# Altium PCB PCB1.1.PcbDoc
Units mil, origin at the board's own origin, x right, y up, seen from the top; angles counter-clockwise.
Board outline 7823 x 1721 mil, 2 copper layers (Top Layer, Bottom Layer); 47 components, 80 nets, 307 pads, 119 vias.
Unrouted connection lines stored in the file: 1.
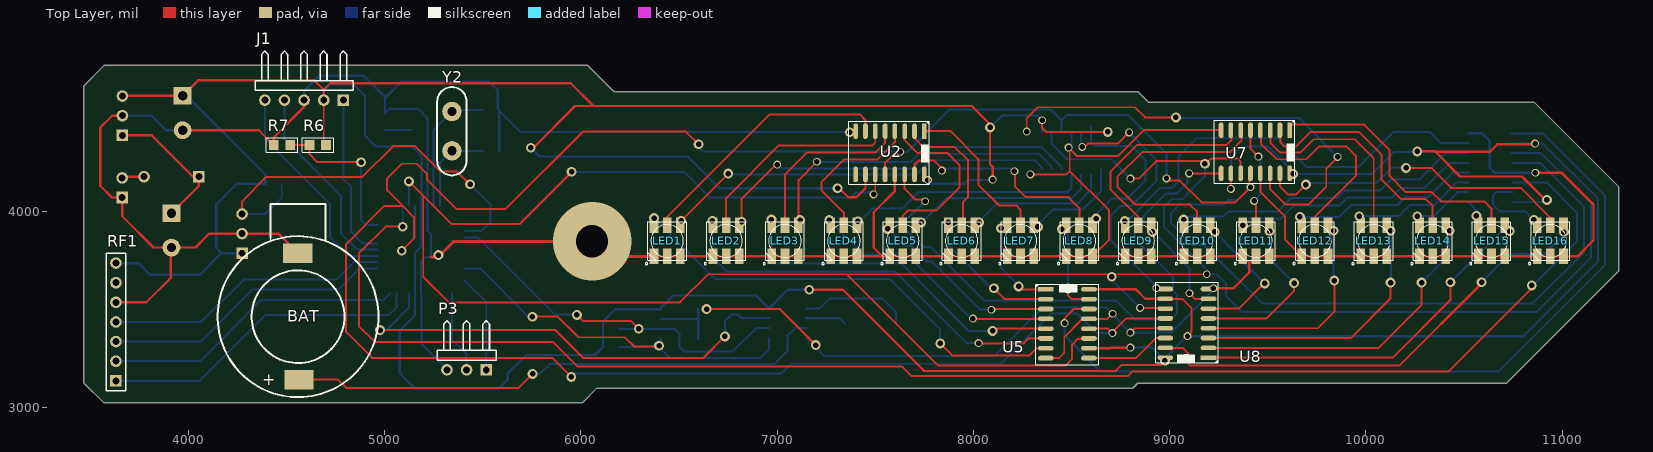
[diagram p0: Top Layer view]
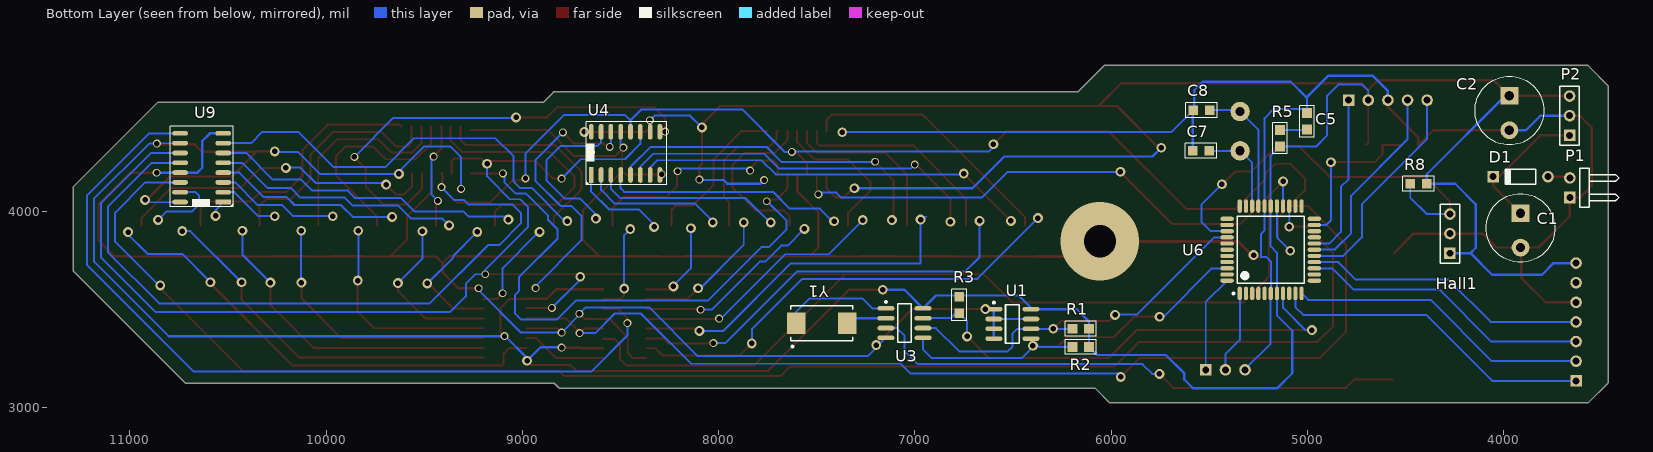
[diagram p1: Bottom Layer view, seen from below]

## Layer stack, top to bottom
Top Layer: signal copper 1.4
Dielectric: dielectric 12.6, FR-4, Dk 4.8
Bottom Layer: signal copper 1.4

## Board outline
3571,4743 3466,4638 3466,4628 3466,3128 3470,3124 3568,3026 3570,3026 6007,3026 6008,3025 6083,3100 6085,3100 8813,3100 8815,3102 8838,3125 8839,3125 10716,3125 11289,3698 11289,3701 11289,4125 10857,4557 10854,4557 8892,4557 8890,4559 8843,4606 8843,4611 6168,4611 6167,4612 6033,4746 6031,4746 3573,4746 3572,4745

## Design rules (kind name [scope] priority, off if disabled: settings)
Clearance [All] p1: gap=10
PolygonConnect [All] p1: connectstyle=Relief reliefconductorwidth=10 reliefentries=4 polygonreliefangle="90 Angle" airgapwidth=10
RoutingVias [All] p1: holewidth=28 width=50 viastyle="Through Hole" minholewidth=28 minwidth=50 maxholewidth=28 maxwidth=50
SilkscreenOverComponentPads [All] p1: minsilkscreentomaskgap=10
SolderMaskExpansion [All] p1: expansion=4
Width [All] p1: maxlimit=10 minlimit=10 preferedwidth=10
27 further rules are at their usual default settings.

## Classes and differential pairs
component class SCH1.1: BAT C1 C2 C5 C7 C8 D1 Hall1 J1 LED1 LED2 LED3 LED4 LED5 LED6 LED7 LED8 LED9 LED10 LED11 LED12 LED13 LED14 LED15 LED16 P1 P2 P3 R1 R2 R3 R5 R6 R7 R8 RF1 U2 U3 U5 U6 U7 U8 U9 Y2

## Components (designator, comment, footprint, x,y, rotation, side; value= is the part's Value field where it differs from the comment)
BAT "Battery" BATTERY 4559,3864 r270 top
C1 "Cap Pol3" "CAP POL 2" 3914,3991 r270 bottom
C2 "Cap Pol3" "CAP POL 2" 3971,4589 r270 bottom
C5 "Cap Semi" SM/C_0805 5002,4501 r270 bottom
C7 "Cap Semi" SM/C_0805 5584,4309 r180 bottom
C8 "Cap Semi" SM/C_0805 5582,4516 r180 bottom
D1 "Diode 1N4148" DO-35 3914,4177 r0 bottom
Hall1 "Header 3" HDR1X3 4274,3787 r90 bottom
J1 "Programming" HDR1X5H 4790,4567 r180 top
LED1 "or 5050 LEDs, the order of the LEDs may vary from one manufacturer to another!" RGBLED5050 6440,3850 r270 top
LED2 "or 5050 LEDs, the order of the LEDs may vary from one manufacturer to another!" RGBLED5050 6740,3850 r270 top
LED3 "or 5050 LEDs, the order of the LEDs may vary from one manufacturer to another!" RGBLED5050 7040,3850 r270 top
LED4 "or 5050 LEDs, the order of the LEDs may vary from one manufacturer to another!" RGBLED5050 7340,3850 r270 top
LED5 "or 5050 LEDs, the order of the LEDs may vary from one manufacturer to another!" RGBLED5050 7640,3850 r270 top
LED6 "or 5050 LEDs, the order of the LEDs may vary from one manufacturer to another!" RGBLED5050 7940,3850 r270 top
LED7 "or 5050 LEDs, the order of the LEDs may vary from one manufacturer to another!" RGBLED5050 8240,3850 r270 top
LED8 "or 5050 LEDs, the order of the LEDs may vary from one manufacturer to another!" RGBLED5050 8540,3850 r270 top
LED9 "or 5050 LEDs, the order of the LEDs may vary from one manufacturer to another!" RGBLED5050 8840,3850 r270 top
LED10 "or 5050 LEDs, the order of the LEDs may vary from one manufacturer to another!" RGBLED5050 9140,3850 r270 top
LED11 "or 5050 LEDs, the order of the LEDs may vary from one manufacturer to another!" RGBLED5050 9440,3850 r270 top
LED12 "or 5050 LEDs, the order of the LEDs may vary from one manufacturer to another!" RGBLED5050 9740,3850 r270 top
LED13 "or 5050 LEDs, the order of the LEDs may vary from one manufacturer to another!" RGBLED5050 10040,3850 r270 top
LED14 "or 5050 LEDs, the order of the LEDs may vary from one manufacturer to another!" RGBLED5050 10340,3850 r270 top
LED15 "or 5050 LEDs, the order of the LEDs may vary from one manufacturer to another!" RGBLED5050 10640,3850 r270 top
LED16 "or 5050 LEDs, the order of the LEDs may vary from one manufacturer to another!" RGBLED5050 10940,3850 r270 top
P1 "DC 12V" HDR1X2H 3663,4071 r90 bottom
P2 "7805" HDR1X3 3664,4388 r90 bottom
P3 "Header 3H" HDR1X3H 5518,3193 r180 top
R1 "Res Semi" SM/C_0805 6197,3402 r180 bottom
R2 "Res Semi" SM/C_0805 6197,3310 r180 bottom
R3 "Res Semi" SM/C_0805 6774,3565 r270 bottom
R5 "Res Semi" SM/C_0805 5140,4415 r270 bottom
R6 "Res Semi" SM/C_0805 4618,4338 r0 top
R7 "Res Semi" SM/C_0805 4435,4338 r0 top
R8 "Res Semi" SM/C_0805 4476,4141 r180 bottom
RF1 "RF Module" HDR1X7 3631,3137 r90 top
U1 "AT24C01BN-SP25-T" 8S1_N 6503,3427 r180 bottom
U2 "74595" SO16 7750,4409 r270 top
U3 "DS1307Z" SOIC8N_N 7053,3431 r180 bottom
U4 "74595" SO16 8649,4186 r90 bottom
U5 "74595" SO16 8369,3603 r0 top
U6 "PIC16F887-E/PT" TQFP-PT44_N 5187,3805 r90 bottom
U7 "74595" SO16 9612,4414 r270 top
U8 "74595" SO16 9198,3255 r180 top
U9 "74595" SO16 10524,4048 r0 bottom
Y1 "32,768KHz" CFPX-93 7475,3430 r180 bottom
Y2 "20MHz" CRYSTAL 5343,4309 r90 top

## Footprints (in the part's own frame and the unit in brackets; to place one, negate y for a bottom-side part, rotate by r counter-clockwise, add the part's x,y. Pads: shape width x height; smd on the part's side, far side on the other; paste and mask are expansions set on the pad)
8S1_N [mm] "SOIC, 8-Leads, Body 4.9x3.9mm, Pitch 1.27mm, IPC Medium Density"
  oval 2.2x0.6 smd: 1(-2.4,1.905) 2(-2.4,0.635) 3(-2.4,-0.635) 4(-2.4,-1.905) 5(2.4,-1.905) 6(2.4,-0.635) 7(2.4,0.635) 8(2.4,1.905)
  silkscreen extent -2.53,-2.5 0.9,2.88, body extent -2,-2.5 2,2.5, height 1.75
BATTERY [mil]
  rect 100x150 smd: 1(76,-1) 2(721,5)
  silkscreen extent -175,-410 810,410
"CAP POL 2" [mil]
  rect 90.53x90.53 hole 47.23: 1(0,0)
  round 90.53 hole 47.23: 2(175,0)
  silkscreen extent -100,-175 250,175
CFPX-93 [mm] "Surface Mount Quartz Crystal; Body 8.2 x 4.7 mm (LxW max)"
  rect 2.4x2.8 smd: 1(-3.3,0) 2(3.3,0)
  silkscreen extent -4,-3.14 4,2.25
CRYSTAL [mil]
  round 98.43 hole 47.23: 1(0,0) 2(200,0)
  silkscreen extent -125,-75 325,75
DO-35 [mm] "Diode, Axial; Body 3.8 x 1.9 mm (LxDia. max), Lead Dia. 0.53 mm (max)"
  round 1.5 hole 0.9: 1(-3.55,0)
  rect 1.5x1.5 hole 0.9: 2(3.55,0)
  silkscreen extent -1.95,-0.95 2.05,0.95
HDR1X2H [mm] "Connector; Header; 2 Position; Right Angle"
  rect 1.5x1.5 hole 0.9: 1(0,0)
  round 1.5 hole 0.9: 2(2.54,0)
  silkscreen extent -1.27,-6.35 3.81,-1.27
HDR1X3 [mm] "Connector; Header; 3 Position"
  rect 1.5x1.5 hole 0.9: 1(0,0)
  round 1.5 hole 0.9: 2(2.54,0) 3(5.08,0)
  silkscreen extent -1.27,-1.27 6.35,1.27
HDR1X3H [mm] "Connector; Header; 3 Position; Right Angle"
  rect 1.5x1.5 hole 0.9: 1(0,0)
  round 1.5 hole 0.9: 2(2.54,0) 3(5.08,0)
  silkscreen extent -1.27,-6.35 6.35,-1.27
HDR1X5H [mm] "Connector; Header; 5 Position; Right Angle"
  rect 1.5x1.5 hole 0.9: 1(0,0)
  round 1.5 hole 0.9: 2(2.54,0) 3(5.08,0) 4(7.62,0) 5(10.16,0)
  silkscreen extent -1.27,-6.35 11.43,-1.27
HDR1X7 [mm] "Connector; Header; 7 Position"
  rect 1.5x1.5 hole 0.9: 1(0,0)
  round 1.5 hole 0.9: 2(2.54,0) 3(5.08,0) 4(7.62,0) 5(10.16,0) 6(12.7,0) 7(15.24,0)
  silkscreen extent -1.27,-1.27 16.51,1.27
RGBLED5050 [mil]
  rect 79x44 smd: 1(-78.74,67) 2(-78.74,0) 3(-78.74,-66.93) 4(79,-66.93) 5(79,0) 6(79,67)
  silkscreen extent -98,-112 122,99
SM/C_0805 [mil]
  rect 50x50 smd: 1(0,0) 2(84,0)
  silkscreen extent -38,-38 122,38
SO16 [mil]
  rect 80x24 smd: 1(0,0)
  oval 80x24 smd: 2(0,-50) 3(0,-100) 4(0,-150) 5(0,-200) 6(0,-250) 7(0,-300) 8(0,-350) 9(220,-350) 10(220,-300) 11(220,-250) 12(220,-200) 13(220,-150) 14(220,-100) 15(220,-50) 16(220,0)
  silkscreen extent -50,-385 270,25, body extent -20,-385 240,25, height 61
SOIC8N_N [mm] "SOIC, 8-Leads, Body 4.9x3.9mm, Pitch 1.27mm, IPC Medium Density"
  oval 2.2x0.6 smd: 1(-2.4,1.905) 2(-2.4,0.635) 3(-2.4,-0.635) 4(-2.4,-1.905) 5(2.4,-1.905) 6(2.4,-0.635) 7(2.4,0.635) 8(2.4,1.905)
  silkscreen extent -2.53,-2.5 0.9,2.88, body extent -2,-2.5 2,2.5, height 1.75
TQFP-PT44_N [mm] "Thin QFP, 44-Leads, Body 10x10mm, Pitch 0.8mm, IPC Medium Density"
  oval 1.75x0.55 smd: 1(-5.65,4) 2(-5.65,3.2) 3(-5.65,2.4) 4(-5.65,1.6) 5(-5.65,0.8) 6(-5.65,0) 7(-5.65,-0.8) 8(-5.65,-1.6) 9(-5.65,-2.4) 10(-5.65,-3.2) 11(-5.65,-4) 23(5.65,-4) 24(5.65,-3.2) 25(5.65,-2.4) 26(5.65,-1.6) 27(5.65,-0.8) 28(5.65,0) 29(5.65,0.8) 30(5.65,1.6) 31(5.65,2.4) 32(5.65,3.2) 33(5.65,4)
  oval 0.55x1.75 smd: 12(-4,-5.65) 13(-3.2,-5.65) 14(-2.4,-5.65) 15(-1.6,-5.65) 16(-0.8,-5.65) 17(0,-5.65) 18(0.8,-5.65) 19(1.6,-5.65) 20(2.4,-5.65) 21(3.2,-5.65) 22(4,-5.65) 34(4,5.65) 35(3.2,5.65) 36(2.4,5.65) 37(1.6,5.65) 38(0.8,5.65) 39(0,5.65) 40(-0.8,5.65) 41(-1.6,5.65) 42(-2.4,5.65) 43(-3.2,5.65) 44(-4,5.65)
  silkscreen extent -5.77,-4.35 4.35,4.95, body extent -5,-5 5,5, height 1.2

## Part data
C1 C2: "Polarized Capacitor (Surface Mount)"
C5 C7 C8: "Capacitor (Semiconductor SIM Model)"
D1: "High Conductance Fast Diode"
Hall1: "Header, 3-Pin"
J1: library part "Header 5H", "Header, 5-Pin, Right Angle"
LED1 LED2 LED3 LED4 LED5 LED6 LED7 LED8 LED9 LED10 LED11 LED12 LED13 LED14 LED15 LED16: library part RGBLED5050
P1: library part "Header 2H", "Header, 2-Pin, Right Angle"
P2: library part "Header 3", "Header, 3-Pin"
P3: "Header, 3-Pin, Right Angle"
R1 R2 R3 R5 R6 R7 R8: "Semiconductor Resistor"
RF1: library part "Header 7", "Header, 7-Pin"
U1: "1Kbit (128 x 8), 2-wire Bus Automotive Serial EEPROM with Write Protect, 2.5V, 8-Pin SOIC, Tape & Reel"
U2 U4 U5 U7 U8 U9: "8-BIT SFT REG WIRTH OUTPUT LCH"
U3: "64 X 8 Serial Real-Time Clock"
U6: "Flash-Based, 8-Bit CMOS Microcontroller with nanoWatt Technology, 8K (x14-Bit words) Program Memory, 624 Bytes Data Memory, 35 I/O pins, 44-Pin TQFP, Standard VDD Range, Extended Temperature"
Y1: library part CFPX-93, "Surface Mount Quartz Crystal"
Y2: library part XTAL

## Via types
v1: diameter 50, hole 28, Top Layer to Bottom Layer, 79 vias
v2: diameter 40, hole 28, Top Layer to Bottom Layer, 39 vias
v3: diameter 400, hole 165, Top Layer to Bottom Layer, 1 vias

## Nets (pads, with @x,y where several pads share a name; then routed paths per layer and width w, separated by ;. In a path a pad name is that pad's centre, name@x,y a point inside that pad or via, vN(x,y) a via of type N, cw(c..) or ccw(c..) an arc to the next point about the centre after c; other vN are vias at no path point)
CLOCK: U2.12 U4.12 U5.12 U6.27 U7.12 U8.12 U9.12 | length 15175.2
  Top Layer w10: v1(5087,3800) 5149,3862 5149,3971 5092,4028 ; v1(5951,3157) 5854,3254 4937,3254 4804,3387 4804,3833 4999,4028 5092,4028 ; v1(6600,4342) 6535,4407 6011,4407 5617,4013 5366,4013 5217,4162 5217,4190 5164,4243 5087,4243 5013,4169 5013,4107 5092,4028 ; U2.12 7550,4249 7604,4303 v2(7627,4303) ; U5.12 8685,3403 v2@8705.5,3382.5 ; v2(8708,3380) v2@8705.5,3382.5 ; U8.12 8778,3455 v2@8705.5,3382.5 ; v2(8984,4168) 8995,4157 9052,4157 9163,4046 9334,4046 v2(9412,4124) ; v2@9408,4124 9408,4190 U7.12
  Bottom Layer w10: v1(5087,3800) 5155.5,3868.5 U6.27 ; v1@5951,3167 5958,3174 7022,3174 7072,3224 8140,3224 8396,3480 8529,3480 8629,3380 v2(8708,3380) ; v1@6597,4331 6623,4305 7619,4305 7619,4295 v2(7627,4303) 7662,4303 7879,4520 8393,4520 8449,4464 ; U4.12 8449,4464 ; v2@8983,4159 8983,4296 8788,4491 8476,4491 8449,4464 ; v2(9412,4124) 9346,4058 9297,4058 9274,4035 9050,4035 9008,3993 9008,3939 9118,3829 9175,3829 9472,3532 10851,3532 11112,3793 11112,4024 10888,4248 U9.12@10748,4248
DO: U6.25 U9.14 | length 7910.4
  Top Layer w10: v1(5092.51,3922.51) 5005.51,3922.51 4869,3786 4869,3416 4949,3336 5858,3336 5985,3209 7637,3209 7685,3161 8787,3161 8810,3184 10420,3184 10845,3609 v1(10845,3623)
  Bottom Layer w10: v1@5083,3913 v1(5092.51,3922.51) U6.25 ; U9.14@10749,4148 10921,4148 11075,3994 11075,3845 10853,3623 v1(10845,3623)
ENABLE: U2.11 U4.11 U5.11 U6.26 U7.11 U8.11 U9.11 | length 14227.2
  Top Layer w10: v1(5124,4153) 5197,4080 ; v1@5954,4201 5690,3937 5340,3937 5197,4080 ; 7357,3680 v2(9189,3680) ; v2@7500,4087 U2.11 ; U5.11 8587,3351 8532,3351 8503,3322 8503,3250 8468,3215 7821,3215 7356,3680 6648,3680 6505,3537 5326,3537 5197,3666 5197,4080 ; v2(8800.5,4167.5) 8842.5,4167.5 8931,4256 9167,4256 v1@9179.5,4243.5 ; v2(8849,3509) 8974,3509 U8.11 ; v1(9180,4243) v1@9179.5,4243.5 ; U7.11 9362,4254 9346,4270 9211,4270 9184.5,4243.5 v1@9179.5,4243.5
  Bottom Layer w10: U6.26 v1@5124.01,4163 ; v1(5953,4202) 6528,4202 6659,4071 7375,4071 7400,4096 v2@7492,4096 ; U4.11 8399,4344 8477,4266 8702,4266 v2(8800.5,4167.5) ; v1(8705,3667) 8705,3653 v2(8849,3509) ; v1@9179.5,4243 9179.5,4178.5 9063.12,4062.12 9011.12,4062.12 8971,4022 8971,3921 9189,3703 v2(9189,3680) 9240,3680 9288.25,3631.75 9288.25,3567.75 9369,3487 10867,3487 11147,3767 11147,4041 10890,4298 U9.11@10741,4298
  other v2: 7492,4087
GND: BAT.1 C1.2 C2.2 C5.1 C7.1 C8.1 Hall1.2 J1.3 LED1.4 LED1.5 LED1.6 LED2.4 LED2.5 LED2.6 LED3.4 LED3.5 LED3.6 LED4.4 LED4.5 LED4.6 LED5.4 LED5.5 LED5.6 LED6.4 LED6.5 LED6.6 LED7.4 LED7.5 LED7.6 LED8.4 LED8.5 LED8.6 LED9.4 LED9.5 LED9.6 LED10.4 LED10.5 LED10.6 LED11.4 LED11.5 LED11.6 LED12.4 LED12.5 LED12.6 LED13.4 LED13.5 LED13.6 LED14.4 LED14.5 LED14.6 LED15.4 LED15.5 LED15.6 LED16.4 LED16.5 LED16.6 P1.1 P2.2 P3.3 R7.1 RF1.5 U1.1 U1.2 U1.3 U1.4 U1.7 U2.8 U2.13 U3.4 U4.8 U4.13 U5.8 U5.13 U6.6 U6.29 U7.8 U7.13 U8.8 U8.13 U9.8 U9.13 | length 22510.8
  Top Layer w10: 4590,4532 J1.3 ; v3(6057,3849) v3@6135,3771 ; LED1.4 LED1.5 LED1.6 ; LED2.4 LED2.5 LED2.6 ; LED3.4 LED3.5 LED3.6 ; LED4.4 LED4.5 LED4.6 ; 7536,3771 LED5.4 LED5.5 LED5.6 ; LED6.4 LED6.5 LED6.6 ; LED7.4 LED7.5 LED7.6 ; v2(8291,4189) 8474,4189 8491,4206 ; U5.8 8435,3253 8463,3281 8463,3360 8556,3453 U5.13 8683,3453 v2(8709,3479) ; LED8.4 LED8.5 LED8.6 8692,3856 8692,4005 8491,4206 ; v2(8485,4325) 8528,4282 8735,4282 8867,4414 U7.8 ; v2@8491,4325 8491,4206 ; LED9.4 LED9.5 LED9.6 ; v2(8800,3383) 8822,3405 U8.13 ; LED10.4 LED10.5 LED10.6 ; LED11.4 9405,3739.07 9405,3736 LED11.5 LED11.6 ; U7.13 9462,4100 9588,3974 9588,3856.07 LED12.4 LED12.5 LED12.6 ; LED13.4 LED13.5 LED13.6 ; LED14.4 LED14.5 LED14.6 ; LED15.4 LED15.5 LED15.6 ; LED16.4 LED16.5 LED16.6
  Top Layer w12: RF1.5 3786,3537 3911,3662 C1.2@3911,3816 ; P2.2 3612,4488 3551,4427 3551,4131 3611,4071 P1.1 3663,3976 3823,3816 C1.2 4036,3816 4107,3887 4459,3887 BAT.1 ; C2.2 4359,4414 R7.1 4435,4377 4590,4532 ; LED1.6 LED2.4 ; v1(6641,3503) 7013,3503 v1(7197,3319) ; LED2.6 LED3.4 ; LED3.6 LED4.4 ; LED4.6 7536,3771 7492,3815 7492,3996 7600,4104 U2.13 ; LED5.6 LED6.4 ; LED6.6 LED7.4 ; LED7.6 LED8.4 ; LED8.6 LED9.4 ; LED9.6 LED10.4 ; LED10.6 LED11.4 ; U8.8@9225,3609 9326,3609 9405,3688 9405,3736 ; LED11.6 LED12.4 ; LED12.6 LED13.4 ; LED13.6 LED14.4 ; LED14.6 LED15.4 ; LED15.6 LED16.4 ; v2@10864,4198 10997,4198 11160,4035 11160,3853 11078,3771 LED16.6
  Top Layer w15: 5237,3767 5272,3767 5352,3847 v3@6038,3847 ; v3@6135,3771 LED1.4
  Bottom Layer w10: C5.1 5022,4521 5173,4521 5218.5,4475.5 U6.29 ; 5002,4578 5004.5,4580.5 ; U6.29@5218,4026 5218,3904 5237,3885 5237,3767 5208,3767 5186,3745 5186,3583.56 U6.6 5187,3327 5314,3200 5311,3200 P3.3 ; C8.1@5577,4521 C8.1 5584,4514 5692,4406 6053,4406 6055,4404 v1(7370,4404) ; U3.4 7240.49,3263 8106,3263 8354,3511 8677,3511 v2(8709,3479) 8704,3479 v2(8800,3383) 9007,3383 9223,3599 9223,3602 v2@9207,3618 ; v2(8485,4325) 8499,4339 U4.13
  Bottom Layer w12: P2.2 3813,4488 3887,4414 C2.2 ; J1.3 4590,4613 4669,4692 4893,4692 5004.5,4580.5 5085,4661 5534,4661 5577,4618 C8.1@5577,4521 ; C5.1 5002,4578 ; C7.1 C8.1@5584,4514 ; U1.7 U1.2 ; U1.4 U1.3 U1.2 ; U1.1 U1.2 ; U9.8@10523,4398 10592,4398 10631,4359 10631,4223 10656,4198 v2@10864,4198
  other v1: 5274,3778
  other v2: 9223,3609 10864,4197
MCLR: J1.1 U6.18 | length 846.8
  Bottom Layer w10: J1.1 4790,4165 4830,4125 4830,3896 4889.5,3836.5 U6.18
NetBat_2: BAT.2 U3.3 | length 2773.7
  Top Layer w10: BAT.2 4565,3144 4761,3144 4804,3101 5683,3101 v1(5754,3172)
  Bottom Layer w10: v1(5754,3172) 5791,3172 5841,3222 6986,3222 7052,3288 7052,3366 7092,3406 U3.3
NetC1_1: C1.1 D1.2 P2.1 | length 721.1
  Top Layer w10: 4024,4177 D1.2
  Top Layer w12: P2.1 3813,4388 4024,4177 ; C1.1 4053.76,4130.76 D1.2
NetC5_2: C5.2 R5.1 | length 138.8
  Bottom Layer w10: C5.2 5004,4415 R5.1
NetC7_2: C7.2 U6.31 Y2.1 | length 464
  Bottom Layer w10: U6.31 5281.49,4184.49 5281.49,4247.49 Y2.1 C7.2
NetC8_2: C8.2 U6.30 Y2.2 | length 716
  Bottom Layer w10: U6.30 5249.99,4377.99 5249.99,4415.99 Y2.2 ; Y2.2@5343,4471 Y2.2 ; C8.2 5350,4516 Y2.2
NetD1_1: D1.1 P1.2 | length 113.7
  Top Layer w10: P1.2 P1.2@3669,4177
  Top Layer w12: P1.2@3669,4177 D1.1
NetLED1_1: LED1.1 U4.7 | length 1995.6
  Top Layer w10: v1(6511,3952) 6511,3953 v1(6751,4193)
  Bottom Layer w10: v1(6511,3952) v1@6521,3952 ; v1@6758,4189 7710,4189 7782,4261 8312,4261 8349,4224 U4.7@8349,4215
NetLED1_2: LED1.2 U2.7 | length 1338.9
  Top Layer w10: LED1.2 6440,3972 6963,4495 7421,4495 7450,4466 U2.7
NetLED1_3: LED1.3 U5.7 | length 2342
  Top Layer w10: v1(7831,3328) 7892,3267 8286,3267 8322,3303 U5.7
  Bottom Layer w10: v1(6373,3966) 6682,3657 7573,3657 7831,3399 v1(7831,3328)
NetLED2_1: LED2.1 U4.6 | length 1849.6
  Top Layer w10: v1(6819,3948) 6819,4065 6993,4239 v2(7001,4239)
  Bottom Layer w10: v2(7001,4239) 7022,4218 7692,4218 7768,4294 8333,4294 8399,4228 U4.6@8399,4215
NetLED2_2: LED2.2 U2.6 | length 1075.1
  Top Layer w10: LED2.2 6740,4068 7009,4337 7487,4337 7500,4350 U2.6
NetLED2_3: LED2.3 U5.6 | length 2069.8
  Top Layer w10: v2@8037,3339 8048,3328 8257.5,3328 8282.5,3353 U5.6
  Bottom Layer w10: v1(6670,3952) 6670,3768 6743,3695 7600,3695 7966,3329 v2(8027,3329)
NetLED3_1: LED3.1 U4.5 | length 1638.1
  Top Layer w10: v1@7110,3973 7110,4160 v2(7203,4253)
  Bottom Layer w10: v2@7216,4251 7678,4251 7756,4329 8347,4329 8449,4227 U4.5@8449,4215
  other v1: 7117,3956
NetLED3_2: LED3.2 U2.5 | length 895.9
  Top Layer w10: LED3.2 7040,4188 7152,4300 7501,4300 7550,4349 U2.5
NetLED3_3: LED3.3 U5.5 | length 1812.6
  Top Layer w10: v1@8083,3391 v1(8098,3391) 8110,3403 U5.5
  Bottom Layer w10: 6942,3973 v1@6967,3973 ; v1(6971,3959) 6971,3736 7632,3736 7977,3391 8089,3391 v1@8098,3400
NetLED4_1: LED4.1 U4.4 | length 1229.9
  Bottom Layer w10: v1(7412,3950) 7429,3950 7431,3952 7431,3961 7484,4014 7637,4014 7723,4100 8481,4100 8499,4118 U4.4
NetLED4_2: LED4.2 U2.4 | length 782.8
  Top Layer w10: LED4.2 7340,3994 7225,4109 7225,4148 7342,4265 7512,4265 7600,4353 U2.4
NetLED4_3: LED4.3 U5.4 | length 1302.3
  Top Layer w10: v2@7998,3453 U5.4
  Bottom Layer w10: v1(7266,3956) 7440,3782 7660,3782 v2@7989,3453
  other v2: 7998,3454
NetLED5_1: LED5.1 U4.3 | length 965.4
  Bottom Layer w10: v1@7729,3934 7863,4068 8501,4068 8549,4116 U4.3
  other v1: 7734,3944
NetLED5_2: LED5.2 U2.3 | length 890.1
  Top Layer w10: LED5.2 7640,3978 7666,4004 7812,4004 7929,4121 7929,4237 7869,4297 7717,4297 7650,4364 U2.3
NetLED5_3: LED5.3 U5.3 | length 993.2
  Top Layer w10: v2@8092,3503 U5.3
  Bottom Layer w10: v1@7550.5,3898.5 v1@7550.5,3915.5 ; v1(7563,3911) 7648,3826 7682,3826 7763.5,3744.5 7790.5,3744.5 8035,3500 v2@8092,3500
  other v2: 8092,3499
NetLED6_1: LED6.1 U4.2 | length 722.6
  Bottom Layer w10: v1@8022,3942 8120,4040 8529,4040 8599,4110 U4.2
  other v1: 8030,3944
NetLED6_2: LED6.2 U2.2 | length 697.8
  Top Layer w10: U2.2 7706,4403 7706,4367 7745,4328 7905,4328 7973,4260 7973,4074 7947,4048 LED6.2@7947,3928.74
NetLED6_3: LED6.3 U5.2 | length 739.5
  Top Layer w10: v1@8119,3623 8119,3594 8160,3553 U5.2
  Bottom Layer w10: v1(7872,3944) 7872,3830 v1@8105,3597
  other v1: 8105,3609
NetLED7_1: LED7.1 U4.1 | length 515.8
  Bottom Layer w10: v1(8329,3921) 8329,3933 8405,4009 8556,4009 8651,4104 U4.1@8651,4215
NetLED7_2: LED7.2 U2.1 | length 812.7
  Top Layer w10: U2.1 7884,4409 8026,4267 8026,4136 8130.5,4031.5 8217.5,4031.5 8240,4009 LED7.2
NetLED7_3: LED7.3 U5.1 | length 479.3
  Top Layer w10: v1(8230,3618) 8245,3603 U5.1
  Bottom Layer w10: v1(8141,3914) 8141,3710 v1@8233,3618
NetLED8_1: LED8.1 U4.15 | length 864.2
  Bottom Layer w10: U4.15@8599,4435 8599,4352 8618,4333 8807,4333 8878,4262 8878,4158 8785,4065 8705,4065 8611,3971 8611,3956 v1@8610,3955
  other v1: 8625,3964
NetLED8_2: LED8.2 U2.15 | length 1141.6
  Top Layer w10: U2.15 7700,4241 7718,4259 7800,4259 v2@7845.5,4213.5 ; v2@8211,4205 8211,4129 8267,4073 8484,4073 8540,4017 LED8.2
  Bottom Layer w10: v2(7840,4208) 7852,4220 8199,4220 v2@8209,4210
  other v2: 8209,4205
NetLED8_3: LED8.3 U5.15 | length 465.5
  Top Layer w10: v1(8481,3607) 8481,3574 8502,3553 U5.15
  Bottom Layer w10: v1(8450,3910) 8481,3879 v1(8481,3607)
NetLED9_1: LED9.1 U8.7 | length 522.9
  Top Layer w10: v2(9101,3583) 9129,3555 U8.7
  Bottom Layer w10: v1@8931,3900 8912,3881 8931,3881 9101,3711 v2(9101,3583)
  other v1: 8912,3896
NetLED9_2: LED9.2 U7.7 | length 1084.8
  Top Layer w10: LED9.2 8840,3972 8698,4114 8698,4203 8833,4338 9289,4338 9315,4364 U7.7@9315,4432
NetLED9_3: LED9.3 U9.7 | length 2165.8
  Bottom Layer w10: v1@8764.5,3957.5 8790.5,3957.5 8953,4120 9013,4120 9045,4152 9045,4281 9137,4373 9552.25,4373 9699.25,4226 9961.75,4226 10140.75,4405 10325,4405 10382,4348 U9.7
  other v1: 8771,3951
NetLED10_1: LED10.1 U8.6 | length 708.6
  Top Layer w10: U8.6 9351,3505 9479,3633 v1(9485,3633)
  Bottom Layer w10: v1(9230,3896) 9353,3773 9353,3765 v1(9485,3633)
NetLED10_2: LED10.2 U7.6 | length 1356.9
  Top Layer w10: LED10.2 9140,3998 9103,4035 8826,4035 8734,4127 8734,4176 8862,4304 9309,4304 9365,4360 U7.6@9365,4432
NetLED10_3: LED10.3 U9.6 | length 1593.2
  Bottom Layer w10: v1@9065,3974 9274,3974 9299,3999 9549,3999 9618,4068 9851,4068 9889,4106 10071,4106 10129,4164 10274,4164 10408,4298 U9.6
  other v1: 9071,3959
NetLED11_1: LED11.1 U8.5 | length 849.8
  Top Layer w10: U8.5 9494,3455 9634,3595 v1(9634,3635)
  Bottom Layer w10: v1(9509,3899) 9509,3760 v1(9634,3635)
NetLED11_2: LED11.2 U7.5 | length 540.4
  Top Layer w10: U7.5@9415,4432 9411,4428 9411,4321 v2(9452,4280) ; LED11.2 v2@9440,4054
  Bottom Layer w10: v2(9430,4054) 9464,4088 9464,4266 v2@9451,4279
NetLED11_3: LED11.3 U9.5 | length 1283.2
  Bottom Layer w10: v1(9373.07,3928.74) 9407.33,3963 9567,3963 9635,4031 9866,4031 9905,4070 10131,4070 10181,4120 10299,4120 10427,4248 U9.5
NetLED12_1: LED12.1 U8.4 | length 1090
  Top Layer w10: U8.4 9755,3405 9839,3489 v1(9839,3648)
  Bottom Layer w10: v1(9836,3902) 9836,3651 v1(9839,3648)
NetLED12_2: LED12.2 U7.4 | length 1092.4
  Top Layer w10: U7.4@9465,4432 9465,4346 9545,4266 9696,4266 9762,4332 9900,4332 9950,4282 9950,4184 9740,3974 LED12.2
NetLED12_3: LED12.3 U9.4 | length 953.6
  Bottom Layer w10: v1(9664,3972) 9864,3972 9925,4033 10161,4033 10201,4073 10317,4073 10442,4198 U9.4
NetLED13_1: LED13.1 U8.3 | length 1355.9
  Top Layer w10: U8.3 9922,3355 10126,3559 v1(10126,3638)
  Bottom Layer w10: v1(10126,3638) 10127,3639 v1(10127,3902)
NetLED13_2: LED13.2 U7.3 | length 1039.8
  Top Layer w10: U7.3@9515,4432 9515,4347 9561,4301 9667,4301 9734,4368 9944,4368 10040,4272 LED13.2
NetLED13_3: LED13.3 U9.3 | length 629.2
  Bottom Layer w10: v1(9966,3976) 10168,3976 10226,4034 10350,4034 10464,4148 U9.3
NetLED14_1: LED14.1 U8.2 | length 1613.5
  Top Layer w10: U8.2 10065,3305 10284,3524 v1(10284,3638)
  Bottom Layer w10: v1(10284,3638) 10426,3780 v1(10426,3902)
NetLED14_2: LED14.2 U7.2 | length 1224.5
  Top Layer w10: U7.2@9565,4432 9565,4349 9582,4332 9645,4332 9718,4405 9963,4405 10080,4288 10080,4162 10179,4063 10305,4063 10340,4028 LED14.2
NetLED14_3: LED14.3 U9.2 | length 312.5
  Bottom Layer w10: v1(10262,3976) 10345,3976 10467,4098 U9.2
NetLED15_1: LED15.1 U8.1 | length 1854.3
  Top Layer w10: U8.1 10136,3255 10431,3550 v1(10431,3639)
  Bottom Layer w10: v1(10431,3639) 10692,3900 v1(10733,3900)
NetLED15_2: LED15.2 U7.1 | length 1368.4
  Top Layer w10: U7.1@9615,4432 9625,4442 9992,4442 10121,4313 10121,4181 10203,4099 10335,4099 10383,4051 10602,4051 10640,4013 LED15.2
NetLED15_3: LED15.3 U9.1 | length 89.4
  Bottom Layer w10: U9.1@10521,4049 10563,4007 v1(10563,3977)
NetLED16_1: LED16.1 U8.15 | length 2388.3
  Top Layer w10: U8.15 9066,3305 9095,3276 9095,3224 9105,3214 10170,3214 10589,3633 v1(10589,3639)
  Bottom Layer w10: v1(10589,3639) 10734,3784 10910,3784 v1@11015,3889
  other v1: 11009,3895
NetLED16_2: LED16.2 U7.15 | length 1672.2
  Top Layer w10: U7.15 9562,4128 9604,4086 9643,4086 v1(9694,4137) ; v1(10205,4222) 10332,4222 10434,4120 10789,4120 10940,3969 LED16.2
  Bottom Layer w10: v1(9694,4137) 9702,4145 10053,4145 10131,4223 v1@10214,4223
NetLED16_3: LED16.3 U9.15 | length 394.2
  Bottom Layer w10: U9.15@10748,4098 10665,4098 10647,4080 10647,4036 10683,4000 10813,4000 v1(10856,3957)
NetRF1_1: RF1.1 U6.10 | length 1655.9
  Bottom Layer w10: RF1.1 4059,3137 4395,3473 5022,3473 5061.02,3512.02 U6.10
NetRF1_2: RF1.2 U6.11 | length 1541.7
  Bottom Layer w10: RF1.2 4060,3237 4372,3549 4995.96,3549 U6.11
NetRF1_3: RF1.3 U6.14 | length 1488.3
  Bottom Layer w10: RF1.3 4063,3337 4329,3603 4766,3603 4873.51,3710.51 U6.14
NetRF1_4: RF1.4 U6.15 | length 1459.9
  Bottom Layer w10: RF1.4 4066,3437 4282,3653 4481.99,3653 4753,3653 4842.01,3742.01 U6.15
NetU2_14: U2.14 U7.9 | length 3110.2
  Top Layer w10: U2.14 7650,4115 7704,4061 v2@7762,4061 ; v2(9099,4194) U7.9
  Bottom Layer w10: v2@7762,4061 7653,3952 7653,3909 7743.75,3818.25 7782.75,3818.25 8055,3546 8728,3546 8825,3449 9005,3449 9038,3482 9038,3574 9016,3596 9016,3667 8821,3862 8821,3910 8870,3959 8870,3980 8981,4091 9034,4091 9091.5,4148.5 v2@9091.5,4201.5
  other v2: 7755,4052
NetU3_1: U3.1 Y1.1 | length 565.2
  Bottom Layer w10: U3.1 7217,3506 7268,3557 7536,3557 7604.92,3488.08 Y1.1
NetU3_2: U3.2 Y1.2 | length 208.4
  Bottom Layer w10: Y1.2@7319.08,3456 Y1.2
  Bottom Layer w12: U3.2 Y1.2@7319.08,3456
NetU4_9: U4.9 U7.14 | length 2392.2
  Top Layer w10: v2(8272,4407) 8272,4476 8327,4531 8823,4531 8875,4479 v1(9032,4479) ; U7.14 9512,4114 9590,4036 9708,4036 9798,4126 9798,4218 v2@9857,4277
  Bottom Layer w10: v1@9032,4477 9657,4477 v2@9857,4277
  other v2: 9856,4278
NetU4_14: U4.14 U8.9 | length 1432.3
  Top Layer w10: v2@8559,4321 8584,4346 8736,4346 v2(8793,4403)
  Bottom Layer w10: U4.14 8549,4331 v2@8559,4321 ; v2(8793,4403) 8934,4262 8934,4157 8805.75,4028.75 8751.75,4028.75 8698,3975 8698,3855 v2@8938,3615
  other v2: 8933,3610 8555,4329
NetU5_9: U5.9 U8.14 | length 431.2
  Top Layer w10: U5.9 8828,3253 8930,3355 U8.14
NetU5_14: U5.14 U9.9 | length 4247.3
  Top Layer w10: v2(8465,3431) 8465,3457 8511,3503 U5.14
  Bottom Layer w10: v2(8465,3431) 8465,3368 8649,3184 10675,3184 11219,3728 11219,4080 10901,4398 U9.9@10743,4398
PGC: J1.4 U6.17 | length 1018.6
  Bottom Layer w10: J1.4 4490,4367 4777,4080 4777,3890 4862,3805 U6.17
PGD: J1.5 U6.16 | length 1117.6
  Bottom Layer w10: J1.5 4390,4370 4723,4037 4723,3868 4817.5,3773.5 U6.16
RX: P3.2 U6.1 | length 420
  Bottom Layer w10: U6.1 5344.48,3345.52 5418,3272 P3.2
SCL: R1.1 U1.6 U3.6 U6.37 | length 1975.8
  Top Layer w10: v1(5980,3473) 6012,3441 6256,3441 v1(6295,3402)
  Bottom Layer w10: U6.37 5475.01,3867.99 5869,3474 v1@5980,3474 ; R1.1 v1(6295,3402) U1.6 6479,3402 6502,3379 6502,3312 6527,3287 6774,3287 6893,3406 U3.6
SDA: R2.1 U1.5 U3.5 U6.42 | length 2089.4
  Top Layer w10: v1(5753,3464) 5883,3464 5988,3359 6224,3359 6271,3312 6386,3312 v1@6400,3298
  Bottom Layer w10: U6.42 5486.49,3710.51 5733,3464 v1(5753,3464) ; R2.1 6366.51,3310 U1.5 6408.51,3298.49 6453,3254 6916,3254 6958.51,3296.51 U3.5
  other v1: 6399,3316
SIGHALL: Hall1.3 R8.1 U6.36 | length 2115.3
  Top Layer w10: Hall1.3 4274,4052 4398,4176 4887,4176 5044,4333 5156,4333 5286,4203 5369,4203 v1@5434.5,4137.5
  Bottom Layer w10: Hall1.3 4393,3987 4476,4070 R8.1 ; U6.36 5493.49,3899.49 5539,3945 5539,4036 v1(5436,4139)
SQW: R3.2 U3.7 U6.8 | length 2450.2
  Top Layer w10: v1(4977,3396) 5869,3396 6011,3254 6625,3254 v1(6734,3363)
  Bottom Layer w10: v1(4977,3396) 5011,3396 5124.01,3509.01 U6.8 ; v1@6729.5,3367.5 6734,3372 6734,3441 6768,3475 6799,3475 6818,3456 U3.7
TX: P3.1 U6.44 | length 499.5
  Bottom Layer w10: U6.44 5518,3538.96 P3.1
VCC: C2.1 Hall1.1 J1.2 P2.3 R1.2 R2.2 R3.1 R5.2 R6.2 R8.2 RF1.7 U1.8 U2.10 U2.16 U3.8 U4.10 U4.16 U5.10 U5.16 U6.7 U6.28 U7.10 U7.16 U8.10 U8.16 U9.10 U9.16 | length 24144.5
  Top Layer w10: P2.3 P2.3@3665,4589 ; J1.2 4690,4350 R6.2 ; v1(5745,4325) v1@5758,4325 ; 7748,3188 8726.28,3188 8756.28,3218 8955,3218 v1(8976,3239) ; v2(8098,4162) v2@8100,4160 ; U8.10 9064,3555 9112,3507 9112,3386 v2(9091,3365) ; v2(9312,4115) U7.10 ; U7.16@9607,4204 U7.16@9615,4212 ; U7.16 v1@9634,4172 ; v1@10926,4046 v1@10928,4046
  Top Layer w12: P2.3@3665,4589 C2.1 4050,4668 4642,4668 4690,4620 ; J1.2 4690,4620 ; v1@5758,4325 5970,4537 6065,4537 ; v1(7163.51,3601) 7335,3601 7748,3188 ; v1@7317,4117 7362,4072 7404,4072 7450,4118 U2.10 ; v1(8085,4428) 8085,4241 8098,4228 v2(8098,4162) ; v1@8087,4442 7992,4537 6065,4537 ; v2(8350,4465) 8350,4426 8371,4405 v1(8685,4405) ; U5.10 8696,3303 8699,3306 v2(8800,3306) ; U5.16 8828,3603 8876,3555 U8.10 ; v1(10262,4306) 10352,4306 ; v2@10862,4342 10670,4342 10632,4304 10354,4304 10480,4178 10796,4178 v1@10928,4046 ; 4690,4620 4723,4653 5949,4653 6065,4537
  Bottom Layer w10: C2.1 C2.1@3993,4589 ; J1.2 4690,4616 4722,4648 4841,4648 4901,4588 4901,4386 4956,4331 R5.2 5187,4284 U6.28 5187,3822 5155.5,3790.5 U6.7 5155.5,3470.5 5077,3392 ; v1(8085,4428) 8146,4489 8326,4489 v2(8350,4465) 8349,4464 U4.10 ; v1(8976,3239) v1@8976,3253 ; v2(9312,4115) 9312,4276 9368,4332 9500,4332 9629,4203 v1(9629,4191) 10032,4191 10145,4304 v1@10262,4304 ; U9.10@10746,4348 v2(10862,4346) ; U9.16@10749.03,4048.68 v1@10921.85,4046.65 ; 10801,3365 11183,3747 11183,4064 10901,4346 v2@10871,4346
  Bottom Layer w12: RF1.7 3746,3737 3805,3678 4059,3678 4169,3788 4142,3815 4142,4036 4247,4141 R8.2 4392,4190 C2.1@3993,4589 ; 4167,3787 Hall1.1 ; 5077,3392 5077,3176 5153,3100 5584,3100 5627,3143 5627,3174 5722,3269 6072,3269 R2.2 R1.2 6113,3440 6175,3502 U1.8 ; v1(5745,4325) 5790,4280 6545,4280 6707,4118 v1(7308,4118) ; U1.8@6403,3504 6471,3572 6892.51,3572 U3.8 7053.51,3601 v1(7163.51,3601) ; v2(7768,4160) 7787,4141 7955.25,4141 7974.25,4160 v2@8098,4160 ; v2@8803,3308 8907,3308 v1(8976,3239) ; v1@8976,3253 v2@9089.5,3366.5 ; v2(9091,3365) 10801,3365
  other v1: 10922,4059
VIN+: R6.1 R7.2 U6.21 | length 842.5
  Top Layer w10: R7.2 R6.1 4618,4291 4658,4251 v1(4880,4251)
  Bottom Layer w10: v1@4861,4249 v1@4880,4230 ; v1(4880,4251) v1@4880,4230 ; U6.21 4903.02,3930.98 4880,3954 v1@4880,4230
pads on no net: RF1.6 U2.9 U6.2 U6.3 U6.4 U6.5 U6.9 U6.12 U6.13 U6.19 U6.20 U6.22 U6.23 U6.24 U6.32 U6.33 U6.34 U6.35 U6.38 U6.39 U6.40 U6.41 U6.43

## Silkscreen, mask and mechanical layers (free items; w line width, h text height)
Top Overlay:
  text "+" at 4377,3115 h60